# Altium PCB Final decision V4.PcbDoc (part 2 of 2)
Units mm, origin at the board's own origin, x right, y up, seen from the top; angles counter-clockwise.
Board outline 75 x 61 mm, 4 copper layers (Top Layer, Signal, GND, Bottom Layer), stack 0.603 mm thick; 144 components, 114 nets, 552 pads, 168 vias.
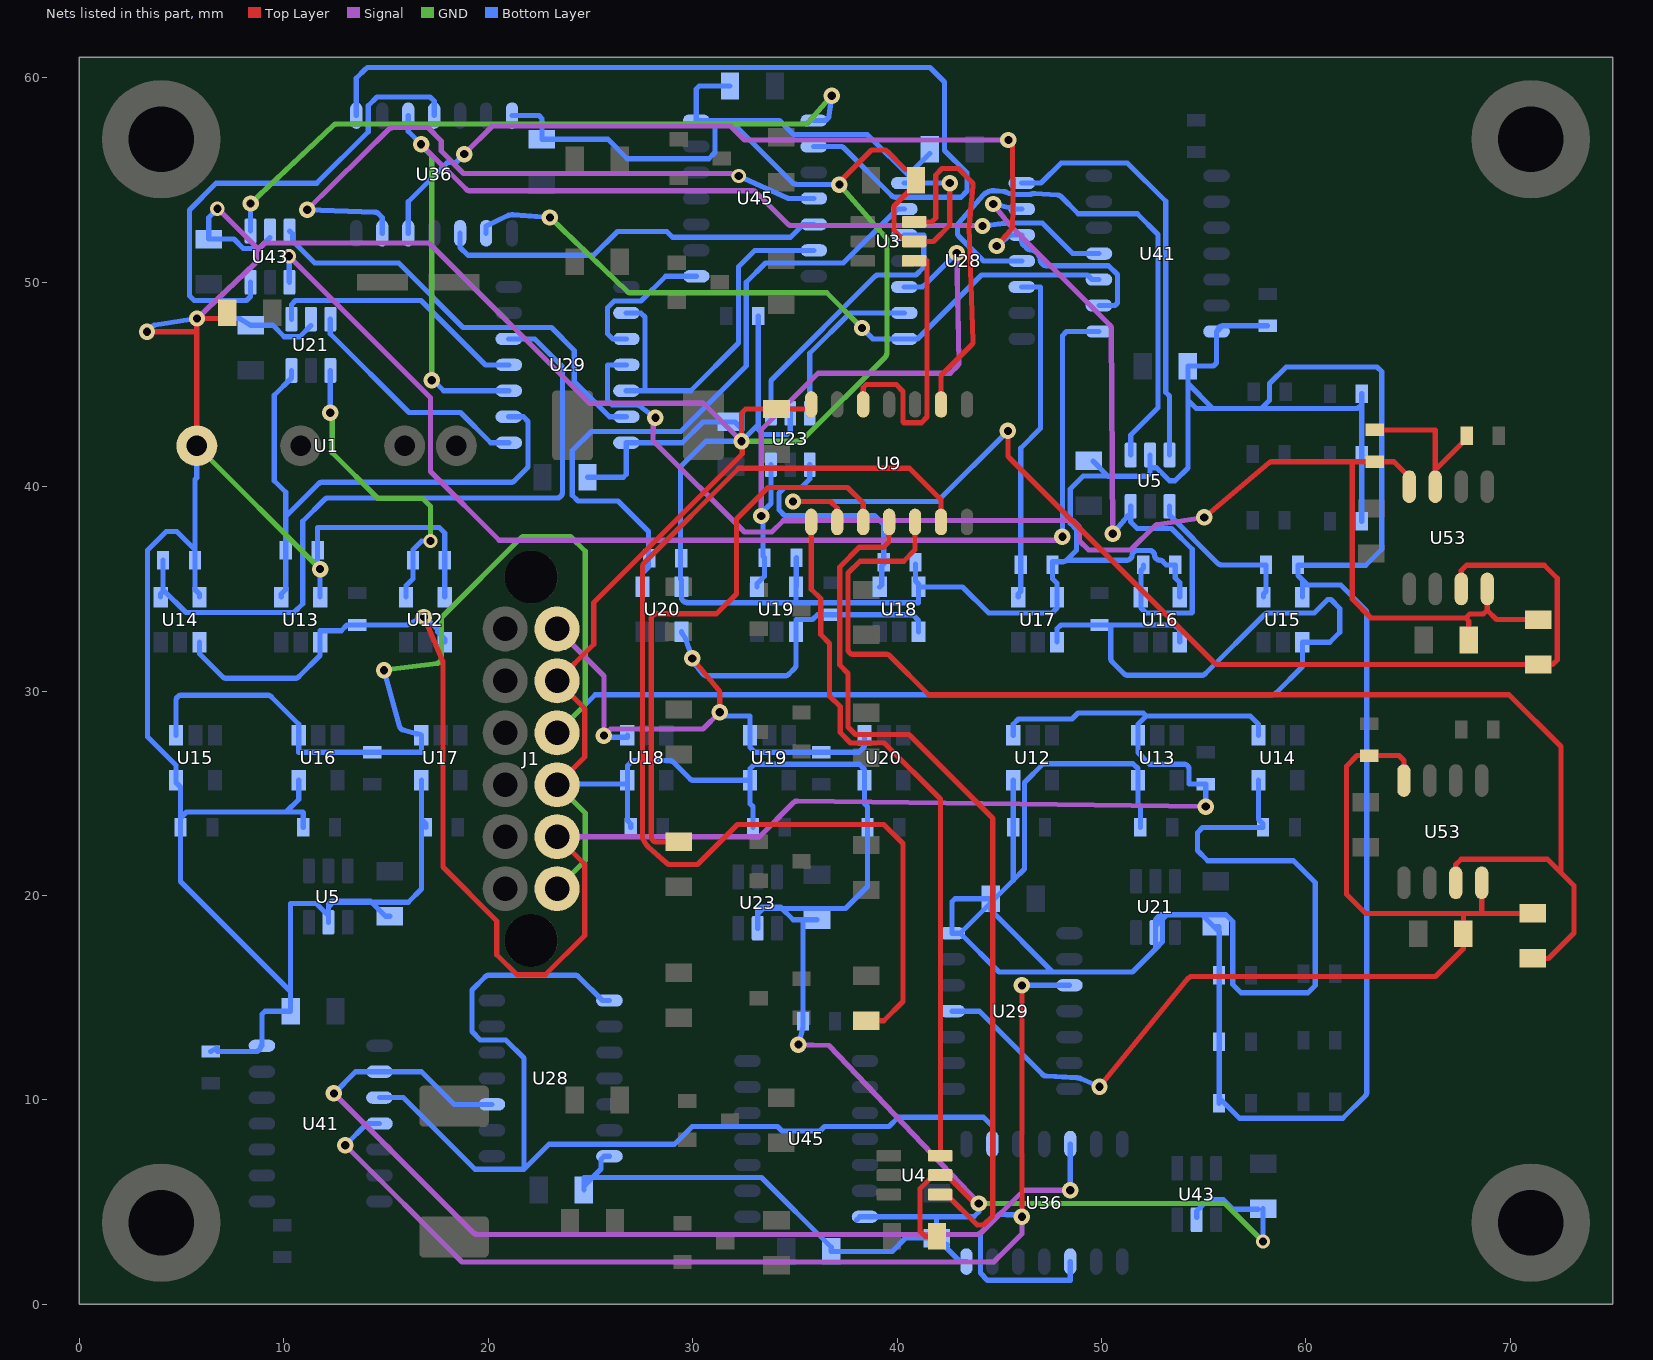
[diagram p4: the nets of this part, all layers, seen from the top]

## Via types
v1: diameter 0.8, hole 0.4, Top Layer to Bottom Layer, 113 vias
v2: diameter 0.7, hole 0.4, Top Layer to Bottom Layer, 55 vias

## Nets (pads, with @x,y where several pads share a name; then routed paths per layer and width w, separated by ;. In a path a pad name is that pad's centre, name@x,y a point inside that pad or via, vN(x,y) a via of type N, cw(c..) or ccw(c..) an arc to the next point about the centre after c; other vN are vias at no path point) (continued)
NetR29_1: R29.1@67.865,42.5 R30.2@63.365,42.78 U53.7@66.325,40 | length 8.1
  Top Layer w0.254: R30.2@63.365,42.78 66.325,42.78 66.325,40.811 ; U53.7@66.325,40 66.325,40.811 ; R29.1@67.865,42.5 67.865,42.351 66.325,40.811
NetR31_1: R31.1@53.46,23.345 U13.4@53.68,25.645 U21.3@53.588,20.702 U29.2@48.43,16.885 | length 17.3
  GND w0.254: v1(50.474,17.23) 51.185,17.941 51.185,23.485 v2(52.725,25.025)
  Bottom Layer w0.254: U29.2@48.43,16.885 49.636,16.885 49.981,17.23 v1(50.474,17.23) ; v2(52.725,25.025) 53.116,25.544 cw(c53.319,25.391) 53.319,25.645 U13.4@53.68,25.645 53.68,23.345 R31.1@53.588,23.345 ; R31.1@53.46,23.345 R31.1@53.588,23.345 ; U21.3@53.588,20.702 R31.1@53.588,23.345
NetR31_1: R31.1@10.095,36.9 U13.4@9.875,34.6 U21.3@10.375,45.685 U29.2@21.005,43.42 | length 27.9
  Bottom Layer w0.254: U13.4@9.875,34.6 9.875,34.756 10.095,34.976 R31.1@10.095,36.9 10.095,38.541 ; U21.3@10.375,45.685 10.375,45.323 9.529,44.477 9.529,40.293 10.095,39.728 10.095,38.541 ; U29.2@21.005,43.42 21.719,43.42 21.95,43.189 21.95,41.059 cw(c21.696,41.059) 21.877,40.88 21.287,40.291 cw(c21.108,40.471) 21.108,40.217 11.876,40.217 ccw(c11.876,39.963) 11.697,40.143 10.095,38.541
NetR33_1: R33.1@18.509,23.345 U17.4@18.629,25.645 U28.5@20.18,12.325 | length 14.5
  Bottom Layer w0.254: U17.4@18.629,25.645 18.629,23.624 18.509,23.504 R33.1@18.509,23.345 18.509,13.251 19.435,12.325 U28.5@20.18,12.325
NetR33_1: R33.1@46.045,36.175 U17.4@45.925,34.6 U28.5@46.1,49.77 | length 16.5
  Bottom Layer w0.254: U17.4@45.925,34.6 45.925,34.756 46.045,34.876 R33.1@46.045,36.175 46.045,41.884 47.02,42.859 47.02,49.77 U28.5@46.1,49.77
NetR34_1: R34.1@12.509,23.345 U5.3@13.13,21.206 U16.4@12.629,25.645 U28.2@20.18,8.515 | length 31.7
  Bottom Layer w0.254: U5.3@13.13,21.206 13.13,21.878 12.509,22.499 R34.1@12.509,23.345 12.509,23.504 12.629,23.624 U16.4@12.629,25.645 12.629,26.223 cw(c12.883,26.222) 12.882,26.476 13.747,26.476 cw(c13.746,26.222) 13.812,26.467 ccw(c13.88,26.71) 13.88,26.458 14.78,26.458 ccw(c14.78,26.71) 14.847,26.467 cw(c14.914,26.222) 14.912,26.476 17.2,26.476 17.53,26.146 17.53,12.658 18.445,11.744 20.68,11.744 21.086,11.337 21.086,8.744 20.858,8.515 U28.2@20.18,8.515
NetR34_1: R34.1@52.045,36.175 U5.3@51.425,39.039 U16.4@51.925,34.6 U28.2@46.1,53.58 | length 33.4
  Signal w0.254: v1(44.7,53.825) 45.493,52.821 ccw(c45.692,52.979) 45.512,52.8 50.401,47.911 ; 50.401,47.91 cw(c50.221,47.731) 50.475,47.733 v1(50.55,37.7)
  Bottom Layer w0.254: v1(44.7,53.825) 45.783,53.586 ccw(c45.837,53.834) 45.837,53.58 U28.2@46.1,53.58 ; v1(50.55,37.7) 51.262,38.561 U5.3@51.425,38.693 ; U5.3@51.425,39.039 U5.3@51.425,38.693 ; R34.1@52.045,36.175 52.045,36.026 51.925,35.906 U16.4@51.925,34.6 51.925,34.067 52.176,33.816 54.411,33.816 54.437,33.842 54.437,36.941 53.421,37.957 51.744,37.957 51.425,38.276 U5.3@51.425,38.693
NetR35_1: R35.1@6.509,23.345 U5.1@11.23,21.206 U15.4@6.629,25.645 | length 16.4
  Bottom Layer w0.254: R35.1@6.509,23.345 6.509,22.691 7.017,22.183 10.925,22.183 11.23,21.878 ; U15.4@6.629,25.645 6.629,26.192 6.837,26.4 11.307,26.4 11.536,26.171 11.536,22.236 11.23,21.929 11.23,21.878 ; U5.1@11.23,21.206 11.23,21.878
NetR35_1: R35.1@58.045,36.175 U5.1@53.325,39.039 U15.4@57.925,34.6 | length 7.8
  Bottom Layer w0.254: U5.1@53.325,39.039 53.325,38.611 55.687,36.249 ccw(c55.866,36.429) 55.866,36.175 R35.1@58.045,36.175 58.045,34.876 57.925,34.756 U15.4@57.925,34.6
NetR36_1: R36.1@59.46,23.345 U14.4@59.58,25.645 U29.5@48.43,13.075 | length 20.4
  GND w0.254: v1(52.151,15.071) 52.961,15.882 ccw(c52.782,16.061) 53.036,16.061 53.036,20.144 cw(c53.29,20.144) 53.11,20.323 v1(55.376,22.59)
  Bottom Layer w0.254: U29.5@48.43,13.075 50.154,13.075 v1(52.151,15.071) ; v1(55.376,22.59) 59.155,22.59 59.46,22.894 R36.1@59.46,23.345 59.46,23.504 59.58,23.624 U14.4@59.58,25.645
NetR36_1: R36.1@4.095,36.4 U14.4@3.975,34.6 U29.5@21.005,47.23 | length 36
  Bottom Layer w0.254: U14.4@3.975,34.6 3.975,34.756 4.095,34.876 U14.4@4.095,34.958 ; R36.1@4.095,36.4 U14.4@4.095,34.958 ; U29.5@21.005,47.23 22.278,47.23 23.551,45.957 cw(c23.371,45.778) 23.625,45.778 23.625,39.704 cw(c23.371,39.704) 23.371,39.45 12.169,39.45 ccw(c12.169,39.196) 11.99,39.376 10.926,38.312 10.926,34.274 10.495,33.842 5.211,33.842 U14.4@4.095,34.958
NetR37_1: R37.1@34.51,23.345 U19.4@34.704,25.645 U23.3@34.13,20.91 U28.10@25.93,12.325 | length 21.7
  Top Layer w0.254: v1(27.325,13.3) 27.309,14.204 cw(c27.563,14.208) 27.309,14.208 27.309,20.198 cw(c27.563,20.198) 27.356,20.344 v1(27.925,21.15)
  Bottom Layer w0.254: U28.10@25.93,12.325 26.315,12.325 27.29,13.3 v1(27.325,13.3) 27.234,13.316 ccw(c27.191,13.065) v1@27.045,13.273 ; v1(27.925,21.15) 29.233,21.119 ccw(c29.239,21.373) 29.418,21.193 30.002,21.777 33.888,21.777 34.13,21.535 ; U23.3@34.13,20.91 34.13,21.535 ; U19.4@34.704,25.645 34.704,25.485 34.51,25.291 R37.1@34.51,23.345 34.51,22.589 34.13,22.209 34.13,21.535
NetR37_1: R37.1@33.515,36.525 U19.4@33.15,35.1 U23.3@33.825,41.079 U28.10@40.35,49.77 | length 30.3
  Signal w0.254: v1(33.355,38.566) 33.355,42.783 36.123,45.551 42.6,45.551 42.958,45.909 ccw(c42.778,46.088) 43.032,46.094 v1(42.914,51.43)
  Bottom Layer w0.254: U19.4@33.15,35.1 33.15,35.25 33.515,35.615 R37.1@33.515,36.525 33.435,36.605 33.435,38.486 v1(33.355,38.566) 33.355,38.714 33.825,39.184 U23.3@33.825,41.079 ; U28.10@40.35,49.77 41.149,49.77 ccw(c41.149,50.024) 41.328,49.844 v1(42.914,51.43)
NetR38_1: R38.1@40.11,23.345 U20.4@40.304,25.645 U28.13@25.93,8.515 | length 26.8
  Bottom Layer w0.254: U28.13@25.93,8.515 28.122,8.515 30.894,11.287 35.082,11.287 35.996,12.201 35.996,17.052 40.11,21.166 R38.1@40.11,23.345 40.11,24.3 40.304,24.495 U20.4@40.304,25.645
NetR38_1: R38.1@27.875,36.5 U20.4@27.55,35.1 U28.13@40.35,53.58 | length 33
  Bottom Layer w0.254: U20.4@27.55,35.1 27.55,35.782 27.845,36.077 27.845,36.225 27.845,37.802 26.344,39.303 24.388,39.303 24.109,39.582 24.109,41.767 25.049,42.706 29.418,42.706 32.618,45.907 32.618,49.996 33.558,50.936 37.368,50.936 40.012,53.58 U28.13@40.35,53.58
NetR39_1: R39.1@28.535,23.345 U18.4@28.704,25.645 U23.1@32.23,20.91 | length 12.5
  Bottom Layer w0.254: 26.671,20.917 cw(c26.852,21.095) 26.672,21.274 27.595,22.198 cw(c27.806,21.986) 27.806,22.285 28.282,22.285 ccw(c28.281,22.539) 28.535,22.539 R39.1@28.535,23.345 28.535,23.504 28.704,23.674 U18.4@28.704,25.645 ; 26.672,20.916 27.311,20.276 ccw(c27.491,20.456) 27.49,20.202 32.23,20.202 U23.1@32.23,20.91
NetR39_1: R39.1@39.345,36.3 U18.4@39.15,35.1 U23.1@35.725,41.079 | length 11.9
  Bottom Layer w0.254: U23.1@35.725,41.079 35.725,40.378 35.31,39.963 34.498,39.963 34.218,39.684 34.218,38.871 34.498,38.592 38.888,38.592 39.345,38.134 39.345,36.225 39.248,36.128 39.248,35.197 U18.4@39.15,35.1
NetR40_1: R40.1@47.24,23.345 U12.4@47.58,25.645 U21.1@51.688,20.702 | length 9.1
  Bottom Layer w0.254: U12.4@47.58,25.645 47.58,24.495 47.24,24.155 R40.1@47.24,23.345 47.24,21.523 48.078,20.685 51.688,20.685 U21.1@51.688,20.702
NetR40_1: R40.1@16.315,36.4 U12.4@15.975,34.6 U21.1@12.275,45.685 | length 15.1
  GND w0.254: v1(12.275,43.621) 12.368,43.528 12.368,41.66 14.601,39.427 16.793,39.427 17.175,39.045 v2(17.175,37.347)
  Bottom Layer w0.254: v1(12.275,43.621) U21.1@12.275,45.685 ; U12.4@15.975,34.6 15.975,35.153 16.315,35.493 R40.1@16.315,36.4 16.315,36.915 16.747,37.347 v2(17.175,37.347)
NetU3_4: U3.4 U9.12 | length 14
  Top Layer w0.254: U9.12@38.34,44.025 38.34,44.844 38.489,44.992 39.959,44.992 40.289,44.662 40.289,43.174 40.34,43.123 41.178,43.123 41.457,43.402 41.457,51.05 U3.4@40.835,51.05
NetU3_6: U3.6 U9.9 | length 17
  Top Layer w0.254: U3.6@40.835,52.95 41.693,52.95 41.889,53.146 41.889,55.251 42.197,55.559 43.003,55.559 43.643,54.919 ; U9.9@42.15,44.025 42.15,45.431 43.643,46.925 ccw(c43.464,47.104) 43.718,47.113 43.523,52.727 cw(c44.175,52.75) 43.526,52.815 43.717,54.714 ccw(c43.464,54.739) 43.644,54.918
NetU4_4: U4.4 U9.4 | length 43.7
  Top Layer w0.254: U9.4@39.61,38.275 39.61,37.303 39.349,37.042 38.155,37.042 37.19,36.077 37.19,31.275 37.598,30.867 37.598,28.246 37.971,27.873 40.58,27.873 44.683,23.77 44.683,4.335 44.226,3.878 43.919,3.878 42.422,5.375 U4.4@42.105,5.375
NetU4_6: U4.6 U9.1 | length 34.6
  Top Layer w0.254: U9.1@35.8,38.275 35.8,34.987 36.264,34.523 36.264,32.769 36.699,32.334 36.699,29.761 37.215,29.244 37.215,27.974 37.723,27.466 39.371,27.466 42.118,24.72 42.118,7.275 U4.6@42.105,7.275
NetU5_4: U5.4@13.13,18.696 U28.4@20.18,11.055 | length 11.6
  Bottom Layer w0.254: U5.4@13.13,18.696 13.13,16.402 18.216,11.315 18.467,11.315 18.727,11.055 U28.4@20.18,11.055
NetU5_4: U5.4@51.425,41.549 U28.4@46.1,51.04 | length 26.8
  Bottom Layer w0.254: 45.226,54.434 cw(c45.224,54.688) 45.199,54.435 44.758,54.474 ccw(c44.7,53.825) 44.209,54.254 43.037,52.912 cw(c42.845,53.08) 43.024,52.899 ccw(c43.204,52.72) 42.95,52.72 42.95,52.421 ccw(c43.204,52.421) 43.024,52.241 44.226,51.04 U28.4@46.1,51.04 ; 45.227,54.434 cw(c45.231,54.18) 45.355,54.402 ccw(c45.75,55.103) 45.75,54.298 46.45,54.298 ccw(c46.45,54.85) 46.63,54.328 cw(c46.712,54.088) 46.73,54.341 47.843,54.265 ccw(c47.861,54.518) 47.853,54.264 ; 47.853,54.264 cw(c47.845,54.01) 48.024,54.19 48.865,53.349 51.744,53.349 52.76,52.333 52.76,43.864 51.425,42.529 U5.4@51.425,41.549
NetU5_6: U5.6@11.23,18.696 U28.1@20.18,7.245 | length 19.6
  Bottom Layer w0.254: U5.6@11.23,18.696 11.23,16.494 11.765,15.959 11.765,9.712 11.993,9.483 12.577,9.483 13.771,10.677 16.204,10.677 19.162,7.719 19.562,7.319 ccw(c19.741,7.499) 19.741,7.245 U28.1@20.18,7.245
NetU5_6: U5.6@53.325,41.549 U28.1@46.1,54.85 | length 20.7
  Bottom Layer w0.254: U28.1@46.1,54.85 47.045,54.85 48.033,55.838 51.262,55.838 53.141,53.959 53.141,44.622 53.325,44.438 U5.6@53.325,41.549
NetU21_4: U21.4@53.588,18.192 U29.4@48.43,14.345 | length 7.4
  Bottom Layer w0.254: U29.4@48.43,14.345 49.992,14.345 51.455,15.808 52.354,15.808 53.588,17.042 U21.4@53.588,18.192
NetU21_4: U21.4@10.375,48.195 U29.4@21.005,45.96 | length 12.7
  Bottom Layer w0.254: U21.4@10.375,48.195 10.375,48.904 10.578,49.107 16.713,49.107 19.86,45.96 U29.4@21.005,45.96
NetU21_6: U21.6@51.688,18.192 U29.1@48.43,18.155 | length 3.3
  Bottom Layer w0.254: U29.1@48.43,18.155 51.688,18.155 U21.6@51.688,18.192
NetU21_6: U21.6@12.275,48.195 U29.1@21.005,42.15 | length 11.7
  Bottom Layer w0.254: U21.6@12.275,48.195 12.275,47.482 16.127,43.629 18.642,43.629 20.121,42.15 U29.1@21.005,42.15
NetU23_4: U23.4@34.13,18.4 U28.12@25.93,9.785 | length 12.4
  Bottom Layer w0.254: U28.12@25.93,9.785 26.646,9.785 34.13,17.269 U23.4@34.13,18.4
NetU23_4: U23.4@33.825,43.589 U28.12@40.35,52.31 | length 13.9
  Bottom Layer w0.254: U23.4@33.825,43.589 33.825,45.096 cw(c34.079,45.095) 33.898,45.273 38.903,50.278 cw(c39.082,50.098) 39.081,50.352 ; 39.082,50.352 40.924,50.352 41.305,50.733 41.305,52.31 U28.12@40.35,52.31
NetU23_6: U23.6@32.23,18.4 U28.9@25.93,13.595 | length 13.7
  Bottom Layer w0.254: U28.9@25.93,13.595 25.274,13.595 25.023,13.344 25.023,12.049 25.354,11.718 27.663,11.718 ccw(c27.663,11.972) 27.842,11.792 32.156,16.106 ccw(c31.976,16.285) 32.23,16.285 U23.6@32.23,18.4
NetU23_6: U23.6@35.725,43.589 U28.9@40.35,48.5 | length 8.4
  Bottom Layer w0.254: U23.6@35.725,43.589 35.725,46.524 37.7,48.5 U28.9@40.35,48.5
NetU29_9: U29.9@42.68,11.805 U29.12@42.68,15.615 U45.6@32.68,10.635 | length 19.9
  Bottom Layer w0.254: U45.6@32.68,10.635 35.319,10.635 36.403,11.718 36.403,15.147 36.936,15.681 42.255,15.681 U29.12@42.321,15.615 ; U29.9@42.68,11.805 41.787,11.805 41.152,12.441 41.152,14.979 41.787,15.615 U29.12@42.321,15.615 ; U29.12@42.68,15.615 U29.12@42.321,15.615
NetU29_9: U29.9@26.755,48.5 U29.12@26.755,44.69 U45.6@35.925,51.56 | length 18.8
  Bottom Layer w0.254: U29.12@26.755,44.69 27.665,44.69 ; U29.9@26.755,48.5 27.459,48.5 27.665,48.294 27.665,44.69 ; U45.6@35.925,51.56 33.039,51.56 32.237,50.758 32.237,47.024 29.903,44.69 27.665,44.69
NetU29_10: U29.10@42.68,13.075 U45.8@38.43,11.905 | length 9.8
  Bottom Layer w0.254: U45.8@38.43,11.905 39.705,11.905 41.695,9.915 43.21,9.915 43.591,10.296 43.591,13.075 U29.10@42.68,13.075
NetU29_10: U29.10@26.755,47.23 U45.8@30.175,50.29 | length 7.3
  Bottom Layer w0.254: U29.10@26.755,47.23 26.088,47.23 25.836,47.482 25.836,48.752 26.166,49.082 27.472,49.082 28.681,50.29 U45.8@30.175,50.29
NetU29_13: U29.13@42.68,16.885 U43.6@53.7,4.145 | length 19.4
  Bottom Layer w0.254: U29.13@42.68,16.885 43.123,16.885 47.528,12.48 50.804,12.48 52.676,10.609 cw(c52.496,10.43) 52.75,10.43 52.75,6.305 ccw(c53.004,6.305) 52.824,6.126 53.709,5.241 U43.6@53.709,4.259
NetU29_13: U29.13@26.755,43.42 U43.6@10.275,52.51 | length 21.3
  Bottom Layer w0.254: U43.6@10.275,52.51 10.438,52.347 10.438,52.012 11.514,50.936 15.623,50.936 18.772,47.786 23.093,47.786 24.211,46.669 24.211,45.147 25.938,43.42 U29.13@26.755,43.42
NetU36_3: U36.3@45.93,7.845 U45.5@32.68,9.365 | length 14.8
  Bottom Layer w0.254: U45.5@32.68,9.365 33.897,9.365 34.498,9.966 39.298,9.966 39.73,9.534 45.039,9.534 45.93,8.643 U36.3@45.93,7.845
NetU36_3: U36.3@18.625,52.4 U45.5@35.925,52.83 | length 19
  Bottom Layer w0.254: U36.3@18.625,52.4 18.625,51.698 19.006,51.317 25.15,51.317 26.319,52.485 28.732,52.485 29.011,52.206 34.788,52.206 35.412,52.83 U45.5@35.925,52.83
NetU36_6: U36.6@49.74,7.845 U45.4@32.68,8.095 | length 22
  Bottom Layer w0.254: U45.4@32.68,8.095 36.75,8.095 37.342,7.502 40.873,7.502 42.143,8.772 43.849,8.772 44.073,8.547 44.073,7.273 44.429,6.918 47.477,6.918 47.782,7.223 47.782,8.493 48.29,9.001 49.636,9.001 49.74,8.897 U36.6@49.74,7.845
NetU36_6: U36.6@14.815,52.4 U45.4@35.925,54.1 | length 32.5
  Signal w0.254: v1(11.15,53.55) 15.144,57.492 cw(c15.323,57.311) 15.323,57.565 17.048,57.565 17.698,56.915 17.698,56.422 18.795,55.325 31.878,55.325 31.918,55.285 32.165,55.285 v2(32.25,55.2)
  Bottom Layer w0.254: v1(11.15,53.55) 14.461,53.429 cw(c14.452,53.175) 14.632,53.355 14.815,53.171 U36.6@14.815,52.4 ; v2(32.25,55.2) 34.632,54.122 ccw(c34.735,54.354) 34.734,54.1 U45.4@35.925,54.1
NetU36_8: U36.8@51.01,2.095 U45.2@32.68,5.555 | length 23.3
  Bottom Layer w0.254: U45.2@32.68,5.555 33.168,5.555 33.609,5.114 33.609,1.939 34.752,0.796 50.728,0.796 51.01,1.078 U36.8@51.01,2.095
NetU36_8: U36.8@13.545,58.15 U45.2@35.925,56.64 | length 45.5
  Bottom Layer w0.254: U36.8@13.545,58.15 13.545,59.981 14.002,60.437 cw(c14.181,60.258) 14.181,60.512 30.942,60.512 41.61,60.512 42.321,59.801 42.321,56.448 43.413,55.356 43.413,54.456 43.119,54.162 39.917,54.162 cw(c39.918,54.416) 39.74,54.235 37.408,56.567 ccw(c37.229,56.386) 37.229,56.64 U45.2@35.925,56.64
NetU36_11: U36.11@47.2,2.095 U43.3@55.6,6.655 | length 25.2
  Signal w0.254: v1(49.917,5.622) 49.937,5.642 62.019,5.642 v1(62.038,5.661)
  Bottom Layer w0.254: U36.11@47.2,2.095 47.2,2.905 v1(49.917,5.622) ; U43.3@55.609,6.769 55.609,7.776 55.757,7.925 59.775,7.925 v1(62.038,5.661)
NetU36_11: U36.11@17.355,58.15 U43.3@8.375,50 | length 23.9
  Bottom Layer w0.254: U43.3@8.375,50 8.375,49.31 8.172,49.107 5.618,49.107 5.389,49.336 5.389,53.539 6.698,54.848 11.612,54.848 14.127,57.362 14.127,58.632 14.559,59.064 17.152,59.064 17.355,58.861 U36.11@17.355,58.15
NetU41_1: U41.1@14.68,12.655 U43.1@53.7,6.655 | length 48.8
  Signal w0.254: v1(14.152,13.471) 15.158,14.477 47.027,14.477 47.959,13.545 ccw(c48.139,13.725) 48.139,13.471 v1(53.709,13.471)
  Bottom Layer w0.254: v1(14.152,13.471) 13.902,13.22 13.902,12.655 U41.1@14.68,12.655 ; U43.1@53.709,6.769 v1(53.709,13.471)
NetU41_1: U41.1@49.875,47.59 U43.1@10.275,50 | length 58.8
  Signal w0.254: v2(10.25,51.275) 17.175,44.35 17.175,40.751 20.543,37.383 47.919,37.383 v1(48.087,37.55)
  Bottom Layer w0.254: v2(10.25,51.275) 10.263,51.262 10.263,50.013 U43.1@10.275,50 ; v1(48.087,37.55) 48.087,47.387 48.29,47.59 U41.1@49.875,47.59
NetU43_4: U43.4@55.6,4.145 U45.1@32.68,4.285 | length 29.6
  Bottom Layer w0.254: U45.1@32.68,4.285 32.926,4.285 32.926,1.412 33.923,0.415 54.818,0.415 55.609,1.206 U43.4@55.609,4.259
NetU43_4: U43.4@8.375,52.51 U45.1@35.925,57.91 | length 33.8
  GND w0.254: v1(8.375,53.85) 12.416,57.673 cw(c12.591,57.489) 12.591,57.743 35.475,57.743 ccw(c35.475,57.997) 35.666,57.83 v1(36.8,59.125)
  Bottom Layer w0.254: U43.4@8.375,52.51 8.375,52.988 v1(8.375,53.85) ; U45.1@35.925,57.91 36.41,57.91 ccw(c36.41,58.164) 36.662,58.129 v1(36.8,59.125)
RED_1: R32.2@71.365,31.3 U9.2 U53.3@67.595,35 | length 57.3
  Top Layer w0.254: v1(34.904,39.277) 36.74,39.277 37.07,38.947 U9.2@37.07,38.275 ; v1(45.42,42.732) 45.42,41.586 ccw(c45.674,41.586) 45.493,41.407 55.526,31.374 ccw(c55.705,31.554) 55.704,31.3 R32.2@71.365,31.3 72.064,31.3 72.293,31.529 72.293,35.518 71.657,36.154 67.85,36.154 67.595,35.899 U53.3@67.595,35
  Bottom Layer w0.254: v1(34.904,39.277) 41.965,39.277 v1(45.42,42.732)
RED_2: R32.2@71.1,16.925 U9.5 U53.3@67.33,20.625 | length 64
  Top Layer w0.254: U9.5@40.88,38.275 40.88,36.915 40.321,36.356 38.181,36.356 37.596,35.772 37.596,33.658 37.598,33.657 37.598,32.054 ccw(c37.852,32.054) 37.852,31.8 39.47,31.8 cw(c39.47,31.546) 39.649,31.726 41.55,29.825 69.934,29.825 72.471,27.289 72.471,21.116 ; U53.3@67.33,20.625 67.33,21.513 67.594,21.777 71.81,21.777 72.471,21.116 ; R32.2@71.1,16.925 71.861,16.925 72.471,17.535 73.106,18.17 73.106,20.481 72.471,21.116
RED_LED_1: R10.2 U9.3 | length 28.6
  Top Layer w0.254: R10.2@29.325,22.625 28.228,22.625 cw(c28.229,22.879) 27.975,22.878 27.975,33.527 cw(c28.229,33.527) 28.229,33.781 31.16,33.781 32.137,34.758 32.137,38.416 33.685,39.963 37.578,39.963 38.34,39.201 U9.3@38.34,38.275
RED_LED_2: R9.2 U9.6 | length 56
  Top Layer w0.254: R9.2@38.5,13.875 39.349,13.875 40.289,14.815 40.289,22.539 39.349,23.479 32.186,23.479 30.23,21.523 28.888,21.523 cw(c28.888,21.777) 28.718,21.588 27.806,22.409 cw(c28.229,22.879) 27.678,22.568 27.583,22.735 cw(c27.804,22.86) 27.55,22.86 27.55,36.086 cw(c27.804,36.086) 27.625,36.265 32.257,40.898 40.611,40.898 42.15,39.359 U9.6@42.15,38.275
Red_On1_A1: U28.3@46.1,52.31 U36.5@16.085,52.4 U41.2@49.875,48.86 | length 47.8
  Top Layer w0.254: v1(44.875,51.775) 45.568,52.574 cw(c45.761,52.408) 45.577,52.584 ccw(c45.394,52.76) 45.648,52.755 45.664,53.57 ccw(c45.012,53.583) 45.664,53.588 45.648,56.649 ccw(c45.394,56.647) v1@45.574,56.826 ; v1(45.445,56.956) v1@45.574,56.827
  Signal w0.254: v1(18.826,56.27) 20.203,57.647 31.841,57.647 32.532,56.956 v1(45.445,56.956)
  Bottom Layer w0.254: U36.5@16.085,52.4 16.085,53.936 18.013,55.864 18.419,55.864 v1(18.826,56.27) ; v1(44.875,51.775) 45.464,52.253 cw(c45.624,52.056) 45.624,52.31 U28.3@46.1,52.31 46.1,52.006 ccw(c46.354,52.006) 46.174,51.827 46.339,51.662 ccw(c46.517,51.843) 46.495,51.59 cw(c46.45,51.04) 47,51.085 ccw(c47.253,51.107) 47.072,50.929 47.119,50.883 ccw(c47.297,51.063) 47.296,50.809 50.347,50.809 50.779,50.377 50.779,48.987 50.652,48.86 U41.2@49.875,48.86
Red_On1_A2: U28.3@20.18,9.785 U36.5@48.47,7.845 U41.2@14.68,11.385 | length 50.8
  Signal w0.254: v1(12.45,10.321) 19.272,3.499 ccw(c19.452,3.679) 19.452,3.425 43.923,3.425 ccw(c43.923,3.679) 44.103,3.499 46.192,5.589 v1(48.468,5.589)
  Bottom Layer w0.254: v1(12.45,10.321) 13.514,11.385 U41.2@14.68,11.385 16.741,11.385 18.341,9.785 U28.3@20.18,9.785 ; v1(48.468,5.589) v1(48.468,5.589) 48.469,7.844 U36.5@48.47,7.845
Red_On2_A1: U28.8@40.35,47.23 U36.2@19.895,52.4 U41.3@49.875,50.13 | length 34.2
  GND w0.254: v1(23.017,53.171) 26.782,49.559 ccw(c26.957,49.742) 26.957,49.488 36.555,49.488 v1(38.282,47.761)
  Bottom Layer w0.254: U36.2@19.895,52.4 19.895,52.75 20.925,53.247 cw(c21.165,52.75) 21.158,53.302 cw(c21.165,52.75) 21.204,53.301 v1(23.017,53.171) ; v1(38.282,47.761) 38.813,47.23 U28.8@40.35,47.23 41.002,47.23 44.124,50.352 49.313,50.352 49.534,50.13 U41.3@49.875,50.13
Red_On2_A2: U28.8@25.93,14.865 U36.2@44.66,7.845 U41.3@14.68,10.115 | length 51.8
  Bottom Layer w0.254: U41.3@14.68,10.115 15.846,10.115 19.348,6.613 21.747,6.613 ; 19.856,16.026 cw(c20.036,15.846) 20.036,16.1 24.242,16.1 cw(c24.242,15.846) 24.422,16.026 25.582,14.865 U28.8@25.93,14.865 ; 19.856,16.026 19.207,15.376 19.207,13.344 19.613,12.938 20.858,12.938 21.747,12.049 21.747,6.613 ; U36.2@44.66,7.845 44.66,8.721 44.228,9.153 40.06,9.153 39.603,8.696 36.445,8.696 36.225,8.476 34.371,8.476 34.15,8.696 29.976,8.696 29.113,7.832 22.966,7.832 21.747,6.613
Red_On3_A1: U29.3@21.005,44.69 U36.10@16.085,58.15 U41.4@49.875,51.4 | length 52.8
  Signal w0.254: v1(16.718,56.753) 18.921,54.549 ccw(c19.1,54.729) 19.1,54.475 32.92,54.475 cw(c32.92,54.221) 33.099,54.401 34.651,52.849 ccw(c34.83,53.029) 34.829,52.775 44.15,52.775 v1(44.175,52.75)
  GND w0.254: v1(16.718,56.753) 16.718,56.69 17.239,56.169 v1(17.239,45.209)
  Bottom Layer w0.254: U36.10@16.085,58.15 16.085,57.385 v1(16.718,56.753) ; v1(17.239,45.209) 17.306,45.209 17.825,44.69 U29.3@21.005,44.69 ; v1(44.175,52.75) 45.278,52.89 cw(c45.31,52.638) 45.307,52.892 ; 45.308,52.892 47.096,52.892 48.588,51.4 U41.4@49.875,51.4
Red_On3_A2: U29.3@48.43,15.615 U36.10@48.47,2.095 U41.4@14.68,8.845 | length 62.5
  Top Layer w0.254: v1(46.105,4.285) v1(46.105,15.605)
  Signal w0.254: v1(13.009,7.781) 18.716,2.075 44.725,2.075 46.105,3.455 v1(46.105,4.285)
  Bottom Layer w0.254: v1(13.009,7.781) 14.073,8.845 U41.4@14.68,8.845 ; v1(46.105,4.285) 46.001,4.389 45.345,4.389 45.331,4.403 44.994,4.403 44.073,3.483 44.073,1.533 44.429,1.177 48.47,1.177 U36.10@48.47,2.095 ; v1(46.105,15.605) 46.116,15.615 U29.3@48.43,15.615
RED_Signal_PL: C13.2@67.965,32.5 R30.1@63.365,41.22 R32.1@71.365,33.5 U29.11@26.755,45.96 U53.4@68.865,35 U53.8@65.055,40 | length 67.6
  Top Layer w0.254: v1(55.025,38.5) 58.188,41.16 cw(c58.351,40.966) 58.351,41.22 62.26,41.22 ; U53.8@65.055,40 65.055,40.471 64.306,41.22 R30.1@63.365,41.22 62.26,41.22 ; C13.2@67.965,32.5 67.965,33.426 67.816,33.575 ; U53.4@68.865,35 68.865,33.96 ; R32.1@71.365,33.5 69.325,33.5 68.865,33.96 ; 62.26,41.22 62.26,34.502 63.187,33.575 67.816,33.575 ; 67.816,33.575 68.009,33.768 68.672,33.768 68.865,33.96
  Signal w0.254: v1(28.175,43.375) 28.071,43.271 28.071,42.615 28.066,42.61 28.066,42.246 32.533,37.779 33.871,37.779 34.43,38.338 35.688,38.338 35.7,38.35 48.601,38.35 48.925,38.026 48.925,37.35 49.377,36.898 51.423,36.898 52.601,38.076 cw(c52.78,37.896) 52.741,38.147 v1(55.025,38.5)
  Bottom Layer w0.254: U29.11@26.755,45.96 25.836,45.96 25.836,44.23 26.065,44.002 27.251,44.002 cw(c27.251,43.748) 27.402,43.951 v1(28.175,43.375)
RED_Signal_SL: C13.2@67.7,18.125 R30.1@63.1,26.845 R32.1@71.1,19.125 U29.11@42.68,14.345 U53.4@68.6,20.625 U53.8@64.79,25.625 | length 52.5
  Top Layer w0.254: v1(49.9,10.65) 54.233,15.943 cw(c54.43,15.782) 54.43,16.036 66.329,16.036 67.7,17.408 C13.2@67.7,18.125 67.7,19.008 ; U53.8@64.79,25.625 64.79,26.601 64.546,26.845 R30.1@63.1,26.845 62.502,26.845 61.98,26.323 61.98,20.065 62.92,19.125 68.651,19.125 ; U53.4@68.6,20.625 68.6,19.176 68.651,19.125 ; R32.1@71.1,19.125 68.651,19.125
  Bottom Layer w0.254: U29.11@42.68,14.345 44.023,14.345 47.128,11.24 ; 47.129,11.239 ccw(c47.307,11.419) 47.294,11.166 48.809,11.086 cw(c48.78,10.535) 48.999,11.041 v1(49.9,10.65)
Sgn_In1_A1: J1.3 R17.2 U15.1 U16.1 U17.1 | length 108.5
  GND w0.254: v1(14.9,31.025) 17.486,31.356 ccw(c17.454,31.608) 17.708,31.608 17.708,33.504 cw(c17.962,33.503) 17.782,33.682 21.588,37.488 cw(c21.767,37.308) 21.766,37.562 ; 21.767,37.562 24.021,37.562 24.744,36.839 24.744,29.339 J1.3@23.365,27.96
  Bottom Layer w0.254: U15.1@4.729,27.845 4.729,29.546 cw(c4.983,29.546) 4.983,29.8 9.205,29.8 cw(c9.205,29.546) 9.385,29.726 10.729,28.381 U16.1@10.729,27.845 10.729,27.01 R17.2@14.33,27.01 16.729,27.01 U17.1@16.729,27.845 16.506,27.917 cw(c16.506,28.171) 16.44,27.925 15.839,28.093 cw(c15.909,28.337) 15.664,28.269 v1(14.9,31.025) ; J1.3@23.365,27.96 25.23,29.825 30.984,29.825 58.341,29.825 ccw(c58.341,30.079) 58.521,29.899 59.825,31.204 U15.1@59.825,32.394 ; U17.1@47.825,32.4 47.825,33.048 48.012,33.235 R17.2@49.9,33.235 50.449,33.235 ; U16.1@53.825,32.4 53.825,32.983 53.573,33.235 50.449,33.235 ; U15.1@59.825,32.4 U15.1@59.825,32.394 ; 50.449,33.235 50.449,31.606 ccw(c50.703,31.606) 50.522,31.428 51.1,30.85 51.101,30.849 ccw(c51.28,31.029) 51.279,30.775 54.895,30.775 ccw(c54.895,31.029) 55.074,30.849 57.968,33.743 cw(c58.147,33.562) 58.147,33.816 60.406,33.816 61.066,34.477 61.218,34.477 61.65,34.045 61.65,32.877 61.168,32.394 U15.1@59.825,32.394
Sgn_In2_A1: J1.1 R18.2 U18.1 U19.1 U20.1 | length 42.6
  Top Layer w0.254: v1(29.975,31.6) 31.263,30.07 cw(c31.069,29.906) 31.323,29.91 31.323,29.908 v1(31.323,28.965)
  Signal w0.254: J1.1@23.365,33.04 25.658,30.747 v1(25.658,27.822) 25.989,28.152 30.51,28.152 v1(31.323,28.965)
  Bottom Layer w0.254: v1(25.658,27.822) 25.658,27.746 26.804,27.746 U18.1@26.804,27.845 ; U20.1@29.45,32.9 29.653,32.56 29.654,32.559 cw(c29.435,32.431) 29.676,32.51 29.913,31.788 v1(29.975,31.6) ; v1@29.901,31.599 v1(29.975,31.6) ; v1(31.323,28.965) 31.323,28.787 32.804,28.787 U19.1@32.804,27.845 32.804,27.255 33.05,27.01 R18.2@36.28,27.01 38.13,27.01 38.404,27.284 U20.1@38.404,27.845 ; 35.05,31.279 cw(c34.796,31.28) 34.976,31.101 34.699,30.824 cw(c34.52,31.004) 34.52,30.75 30.687,30.75 cw(c30.687,31.004) 30.496,30.837 cw(c30.687,31.004) 30.485,30.849 30.027,31.437 cw(c30.229,31.591) v1(29.975,31.6) ; 35.05,31.28 U19.1@35.05,32.9 35.05,33.5 35.868,33.5 36.102,33.735 R18.2@36.85,33.735 40.776,33.735 41.05,33.461 U18.1@41.05,32.9
Sgn_In3_A1: J1.5 R19.2 U12.1 U13.1 U14.1 | length 97.7
  Top Layer w0.254: v1(16.85,33.625) 17.78,31.424 17.78,21.395 20.418,18.757 20.418,17.105 21.4,16.123 22.79,16.123 24.717,18.05 24.717,21.528 J1.5@23.365,22.88
  Signal w0.254: J1.5@23.365,22.88 33.264,22.88 34.93,24.546 cw(c35.109,24.366) 35.113,24.62 v1(55.1,24.35)
  Bottom Layer w0.254: U14.1@5.875,32.4 5.875,31.832 7.008,30.699 ccw(c7.187,30.879) 7.187,30.625 10.551,30.625 ccw(c10.551,30.879) 10.73,30.699 11.775,31.744 U13.1@11.775,32.4 11.775,32.953 12.806,32.953 13.088,33.235 R19.2@13.6,33.235 15.972,33.235 ccw(c15.972,33.489) 16.081,33.26 v1(16.85,33.625) 16.906,33.625 17.527,33.004 17.527,32.898 17.875,32.55 U12.1@17.875,32.4 ; U12.1@45.68,27.845 45.68,28.381 45.934,28.635 48.553,28.635 48.849,28.931 52.044,28.931 52.188,28.787 ; v1(55.1,24.35) 55.1,25.277 R19.2@55.097,25.45 ; R19.2@55.105,25.45 R19.2@55.097,25.45 ; U14.1@57.68,27.845 57.68,28.381 57.273,28.787 52.186,28.787 51.78,28.381 U13.1@51.78,27.845 51.78,26.999 52.354,26.425 54.03,26.425 cw(c54.03,26.171) 54.284,26.172 54.284,25.45 R19.2@55.097,25.45
Sgn_Out1_A1: C2.2 C3.2 C4.2 C5.2 C6.2 C7.2 C8.2 C9.2 C10.2 C11.1 C14.1 C15.1 C18.2 J1.2 J1.4 J1.6 R20.2 R21.1 R23.1 R25.2 R27.2 R31.2 R33.2 R34.2 R35.2 R36.2 R37.2 R38.2 R39.2 R40.2 U1.6 U3.5 U4.5 U5.5 U9.14 U12.5 U13.5 U14.5 U15.5 U16.5 U17.5 U18.5 U19.5 U20.5 U21.5 U23.5 U28.14 U29.14 U36.14 U41.14 U43.5 U45.14 | length 627
  Top Layer w0.254: v1(3.306,47.583) 5.745,47.583 ; U1.6@5.745,42 5.745,46.82 5.745,47.583 ; C2.2@7.225,48.3 C2.2@7.225,48.5 6.95,48.225 v1(5.75,48.225) 5.745,47.583 ; J1.4@23.365,25.42 24.719,26.774 24.719,29.146 J1.2@23.365,30.5 25.159,32.294 25.159,34.337 32.425,41.604 v1@32.425,42.225 ; v1(32.389,42.224) 32.389,43.589 32.6,43.8 C18.2@34.1,43.8 35.055,43.8 35.056,43.799 35.8,43.799 U9.14@35.8,44.025 ; v1(37.175,54.775) 37.175,54.906 38.669,56.401 cw(c38.849,56.221) 38.849,56.475 39.345,56.475 cw(c39.345,56.221) 39.524,56.401 40.402,55.523 40.602,55.523 40.925,55.2 C14.1@40.925,55 ; U3.5@40.231,52.163 39.849,52.545 39.849,53.724 C14.1@40.925,54.8 ; U3.5@40.835,52 41.787,52 42.575,52.787 v1(42.575,54.85) v1@42.575,54.898 ; C15.1@41.95,3.325 41.381,3.325 41.127,3.579 41.127,5.662 41.79,6.325 U4.5@42.105,6.325 42.42,6.325 43.704,5.041 43.893,5.041 v1(43.997,4.937)
  Signal w0.254: v1(5.75,48.225) 8.586,50.911 ccw(c8.412,51.096) 8.666,51.096 8.666,51.52 8.796,51.65 ; v2(6.75,53.6) 6.775,53.6 8.725,51.65 8.796,51.65 ; v1(32.389,42.224) 30.535,44.078 24.947,44.078 17.099,51.927 9.072,51.927 8.796,51.65 ; v1(35.173,12.706) 36.668,12.667 v1(43.997,4.937)
  GND w0.254: U1.6@5.745,42 v1(11.775,35.97) ; J1.6@23.365,20.34 24.744,21.719 24.744,24.041 J1.4@23.365,25.42 ; v1(32.389,42.224) 35.194,42.224 ccw(c35.194,42.478) 35.373,42.298 39.425,46.35 ccw(c39.245,46.529) 39.499,46.529 39.499,52.041 ccw(c39.245,52.041) 39.436,52.209 v1(37.175,54.775) ; v1(43.997,4.937) 56.038,4.937 v2(57.9,3.075)
  Bottom Layer w0.254: v1(3.306,47.583) v1@3.56,47.836 ; v1@3.56,47.837 cw(c3.738,47.656) 3.699,47.907 v1@5.73,48.222 ; v1@5.73,48.222 v1(5.75,48.225) 7.852,48.218 C9.2@8.375,47.895 9.466,47.895 10.023,47.338 10.783,47.338 U21.5@11.325,47.88 ; U1.6@5.745,42 5.745,40.434 5.655,40.344 5.655,36.915 ; U14.5@5.875,34.6 5.875,34.756 5.655,34.976 R36.2@5.655,36.4 5.655,36.915 ; R21.1@6.43,12.375 6.753,12.548 R21.1@6.753,12.375 ; v2(6.75,53.6) 6.325,53.175 C11.1@6.325,52.11 7.559,52.11 8.016,51.653 8.783,51.653 U43.5@9.325,52.195 ; U16.5@10.729,25.645 10.729,24.704 10.114,24.088 ; R34.2@10.949,23.345 10.949,24.063 10.924,24.088 10.114,24.088 ; U13.5@11.775,34.6 v1@11.775,35.867 ; v1(11.775,35.97) v1@11.775,35.867 ; 12.18,19.44 12.408,19.669 16.083,19.669 16.729,20.315 R33.2@16.729,23.724 ; C4.2@15.18,18.985 14.98,18.985 14.231,19.734 12.328,19.734 12.18,19.585 U5.5@12.18,18.696 12.18,19.008 11.583,19.605 10.33,19.605 10.33,15.304 ; U17.5@16.729,25.645 R33.2@16.729,23.724 ; R33.2@16.949,23.345 16.949,23.504 R33.2@16.729,23.724 ; U12.5@17.875,34.6 R40.2@17.875,36.4 17.875,37.739 17.607,38.007 11.655,38.007 R31.2@11.655,36.9 11.655,35.987 v1@11.775,35.867 ; U36.14@21.165,58.15 22.476,58.15 22.625,58.001 C8.2@22.625,57 25.843,57 26.801,56.041 30.789,56.041 31.094,56.346 31.094,57.642 30.825,57.91 ; J1.4@23.365,25.42 23.405,25.46 U18.5@26.804,25.46 ; C5.2@24.68,5.595 C5.2@24.68,5.795 ; C7.2@24.855,40.46 26.606,40.46 26.755,40.609 U29.14@26.755,42.15 29.488,42.15 30.51,43.172 C3.2@31.875,43.172 32.066,43.172 32.389,42.849 v1(32.389,42.224) ; U28.14@25.93,7.245 25.673,7.245 25.513,7.085 25.513,6.629 C5.2@24.68,5.795 ; R39.2@26.975,23.345 26.975,23.504 26.804,23.674 U18.5@26.804,25.46 ; C10.2@31.825,59.6 30.324,59.6 30.175,59.452 U45.14@30.175,57.91 30.825,57.91 ; R37.2@32.95,23.345 32.95,24.349 32.804,24.495 U19.5@32.804,25.638 ; U23.5@33.18,18.4 33.18,19.289 33.328,19.438 34.301,19.438 34.921,18.818 35.4,18.818 ; 33.18,19.087 33.456,19.364 37.469,19.364 38.55,20.444 R38.2@38.55,23.345 38.55,24.349 38.404,24.495 U20.5@38.404,25.645 38.404,26.171 38.15,26.425 33.024,26.425 32.804,26.205 U19.5@32.804,25.645 U19.5@32.804,25.638 ; R20.2@33.205,48.35 33.205,43.039 ; 33.654,42.551 34.419,42.551 ; 33.654,42.554 33.456,42.554 33.205,42.805 33.205,43.039 ; 34.419,42.554 34.419,42.551 ; 34.775,42.808 U23.5@34.775,43.589 34.775,42.7 34.626,42.551 34.419,42.551 ; 34.881,54.87 31.841,57.91 ; 34.882,54.869 ccw(c35.061,55.05) 35.058,54.796 v1(37.175,54.775) ; R37.2@35.075,36.525 35.063,36.513 35.063,35.112 U19.5@35.05,35.1 35.05,34.325 ; v1(35.173,12.706) 35.391,13.547 ccw(c35.146,13.611) 35.4,13.611 R20.2@35.4,13.845 35.4,18.818 ; C3.2@36.08,18.818 35.4,18.818 ; U45.14@38.013,4.125 38.173,4.285 U45.14@38.43,4.285 41.9,4.285 ; U28.14@40.35,54.85 v1(42.575,54.85) ; R39.2@40.905,36.225 40.905,35.384 41.05,35.239 U18.5@41.05,35.1 ; C5.2@41.6,56.3 40.766,55.466 40.766,55.01 38.541,57.235 34.929,57.235 34.254,57.91 31.841,57.91 ; v1@42.463,55.01 v1@42.575,54.898 ; U36.14@43.39,2.095 U36.14@43.185,2.095 ; v1(43.997,4.937) 43.997,4.53 43.752,4.285 41.9,4.285 ; U12.5@45.68,25.645 R40.2@45.68,23.345 45.68,20.745 ; C4.2@49.575,41.26 50.324,40.511 52.226,40.511 52.375,40.66 52.375,40.928 ; 50.324,40.522 49.103,40.522 48.468,39.887 48.468,38.211 48.772,37.906 48.772,36.89 48.287,36.405 ; R31.2@51.9,23.345 51.9,24.375 51.78,24.495 U13.5@51.78,25.645 51.78,26.212 51.541,26.45 47.147,26.45 46.232,25.536 46.232,21.298 45.68,20.745 ; U5.5@52.375,41.549 52.375,40.928 ; U16.5@53.825,34.6 53.825,35.315 53.605,35.535 R34.2@53.605,36.175 53.167,36.175 53.011,36.33 ccw(c52.832,36.151) 52.85,36.404 52.832,36.406 cw(c52.85,36.659) 52.597,36.641 ccw(c52.345,36.625) 52.345,36.877 51.745,36.877 ccw(c51.745,36.625) 51.494,36.641 cw(c51.24,36.659) 51.241,36.405 48.287,36.405 ; 53.939,19.049 53.18,19.049 52.989,18.858 ; U43.5@54.659,4.259 54.659,4.574 55.201,5.116 55.968,5.116 56.425,4.659 C11.1@57.659,4.659 ; C9.2@55.588,18.492 55.75,18.492 C9.2@55.75,18.229 ; U41.14@55.677,47.616 cw(c55.931,47.616) U41.14@55.931,47.87 ; R27.2@55.75,9.845 R25.2@55.75,12.845 R23.1@55.75,16.095 C9.2@55.75,18.229 ; U14.5@57.68,25.645 57.68,23.724 57.9,23.504 R36.2@57.9,23.345 57.9,23.326 54.945,23.326 54.691,23.072 54.691,22.209 55.199,21.701 59.39,21.701 60.456,20.634 60.456,15.605 60.101,15.249 56.824,15.249 56.418,15.655 56.418,18.729 56.088,19.059 54.919,19.059 ; v2(57.9,3.075) C11.1@57.9,4.675 ; R21.1@58.125,47.87 57.797,47.87 U41.14@55.932,47.87 ; R35.2@59.605,36.175 R35.2@59.605,36.153 ; U15.5@59.825,34.6 59.825,35.438 ; R23.1@62.73,38.3 R25.2@62.73,41.55 62.73,44.027 ; R27.2@62.73,44.55 62.73,44.027 ; 4.949,23.801 R35.2@4.949,23.345 4.949,20.685 10.33,15.304 ; 4.949,23.801 4.949,25.316 4.729,25.536 U15.5@4.729,25.645 4.729,26.374 3.332,27.772 3.332,36.89 4.246,37.804 4.766,37.804 5.655,36.915 ; 4.949,23.801 5.237,24.088 10.114,24.088 ; R21.1@6.753,12.375 ccw(c6.759,12.629) R21.1@6.757,12.375 ; R21.1@6.753,12.375 ccw(c6.759,12.629) R21.1@6.757,12.375 ; R21.1@6.757,12.375 8.623,12.375 ccw(c8.623,12.629) 8.877,12.629 8.877,12.655 U41.14@8.93,12.655 8.93,14.196 9.078,14.345 C6.2@10.33,14.345 10.33,15.304 ; C5.2@24.68,5.795 24.68,6.207 33.368,6.207 36.78,2.795 C10.2@36.78,2.595 39.762,2.595 40.412,3.245 C8.2@41.93,3.245 ; U18.5@26.804,25.46 U18.5@26.804,25.645 26.804,26.349 27.058,26.603 28.867,26.603 cw(c28.867,26.349) 29.045,26.53 29.864,25.711 ccw(c30.043,25.892) 30.041,25.638 U19.5@32.804,25.638 ; 30.825,57.91 31.841,57.91 ; v1(32.389,42.224) 33.205,43.039 ; v1(32.389,42.224) 30.65,42.224 29.405,40.979 29.405,35.487 29.45,35.442 U20.5@29.45,35.1 29.45,34.598 ccw(c29.704,34.598) 29.704,34.344 29.724,34.324 35.05,34.324 ; 35.05,34.324 41.05,34.324 U18.5@41.05,35.1 ; U18.5@41.05,35.1 43.196,35.1 44.48,33.816 47.571,33.816 47.825,34.07 U17.5@47.825,34.6 47.825,35.273 47.605,35.493 R33.2@47.605,36.175 47.605,36.331 48.108,36.331 ccw(c48.108,36.585) 48.287,36.405 ; 41.9,4.285 41.93,4.255 C8.2@41.93,3.245 ; C8.2@41.93,3.245 42.453,2.922 C8.2@42.299,2.922 ; C8.2@42.299,2.922 ccw(c42.544,2.989) C8.2@42.364,2.811 ; C8.2@42.299,2.922 ccw(c42.544,2.989) C8.2@42.364,2.811 ; C8.2@42.364,2.811 43.006,2.169 ; 43.006,2.169 ccw(c43.185,2.349) U36.14@43.185,2.095 ; 43.006,2.169 ccw(c43.185,2.349) U36.14@43.185,2.095 ; U29.14@43.09,18.155 C7.2@44.58,19.645 ; U29.14@43.09,18.155 44.979,16.265 47.604,16.265 ; U29.14@43.09,18.155 U29.14@42.68,18.155 42.68,19.696 42.828,19.845 C7.2@44.58,19.845 C7.2@44.58,19.645 ; C7.2@44.58,19.645 45.68,20.745 ; C7.2@44.58,19.645 44.58,19.289 47.604,16.265 ; 47.604,16.265 51.516,16.265 52.638,17.387 ; 52.375,40.928 52.684,40.928 53.319,40.293 53.598,40.293 54.225,40.92 54.225,44.23 ; 52.638,17.387 52.989,17.738 52.989,18.858 ; 52.638,17.387 U21.5@52.638,18.192 U21.5@52.638,18.507 ; U21.5@52.638,18.507 52.989,18.858 ; U21.5@52.638,18.507 52.638,18.83 52.866,19.059 52.989,19.059 ; 52.989,18.858 52.989,19.059 ; 52.989,19.059 54.919,19.059 ; 54.225,44.23 54.225,45.043 ; 54.225,44.23 54.631,43.824 55.444,43.824 ; 54.225,45.043 C6.2@54.225,45.9 55.476,45.9 55.625,46.049 U41.14@55.625,47.59 55.656,47.59 U41.14@55.931,47.87 ; 54.225,45.043 55.444,43.824 ; 54.919,19.059 C9.2@55.75,18.229 ; 55.444,43.824 57.815,43.824 ; C9.2@55.75,18.229 55.757,18.221 55.757,10.093 56.748,9.102 61.803,9.102 62.901,10.2 ccw(c62.721,10.38) 62.975,10.38 62.975,33.809 ccw(c62.721,33.809) 62.901,33.988 61.701,35.188 60.075,35.188 59.825,35.438 ; 57.815,43.824 62.527,43.824 62.73,44.027 ; 57.815,43.824 58.221,44.23 58.221,45.043 59.034,45.856 63.479,45.856 63.708,45.627 63.708,36.941 62.92,36.153 R35.2@59.605,36.153 ; R35.2@59.605,36.153 59.605,35.658 59.825,35.438
pads on no net: J1.8 J1.10 J1.A U41.6 U41.8 U45.3 U45.11 U53.5

## Polygon pours and split planes (outlines as drawn)
GND on Bottom Layer "GND_L04_P003" (solid, remove dead copper, pour order 3): 0.325,0 0.325,61 75.325,61 75.325,0
GND on Top Layer "GND_L01_P000" (solid, remove dead copper, pour order 0): 0,0 0,61 75.325,61 75.325,0
GND on Signal "GND_L02_P001" (solid, remove dead copper, pour order 1): 0.325,0 0.325,61 75.325,61 75.325,0
GND on GND "GND_L03_P002" (solid, remove dead copper, pour order 2): 0.325,0 0.325,61 75.325,61 75.325,0

## Silkscreen, mask and mechanical layers (free items; w line width, h text height)
Mechanical 1:
  the board outline again, w0.254